# Altium PCB PCB1.PcbDoc
Units mm, origin at the board's own origin, x right, y up, seen from the top; angles counter-clockwise.
Board outline 55.12 x 55.63 mm, 2 copper layers (Top Layer, Bottom Layer); 19 components, 24 nets, 84 pads, 0 vias.
Unrouted connection lines stored in the file: 19.
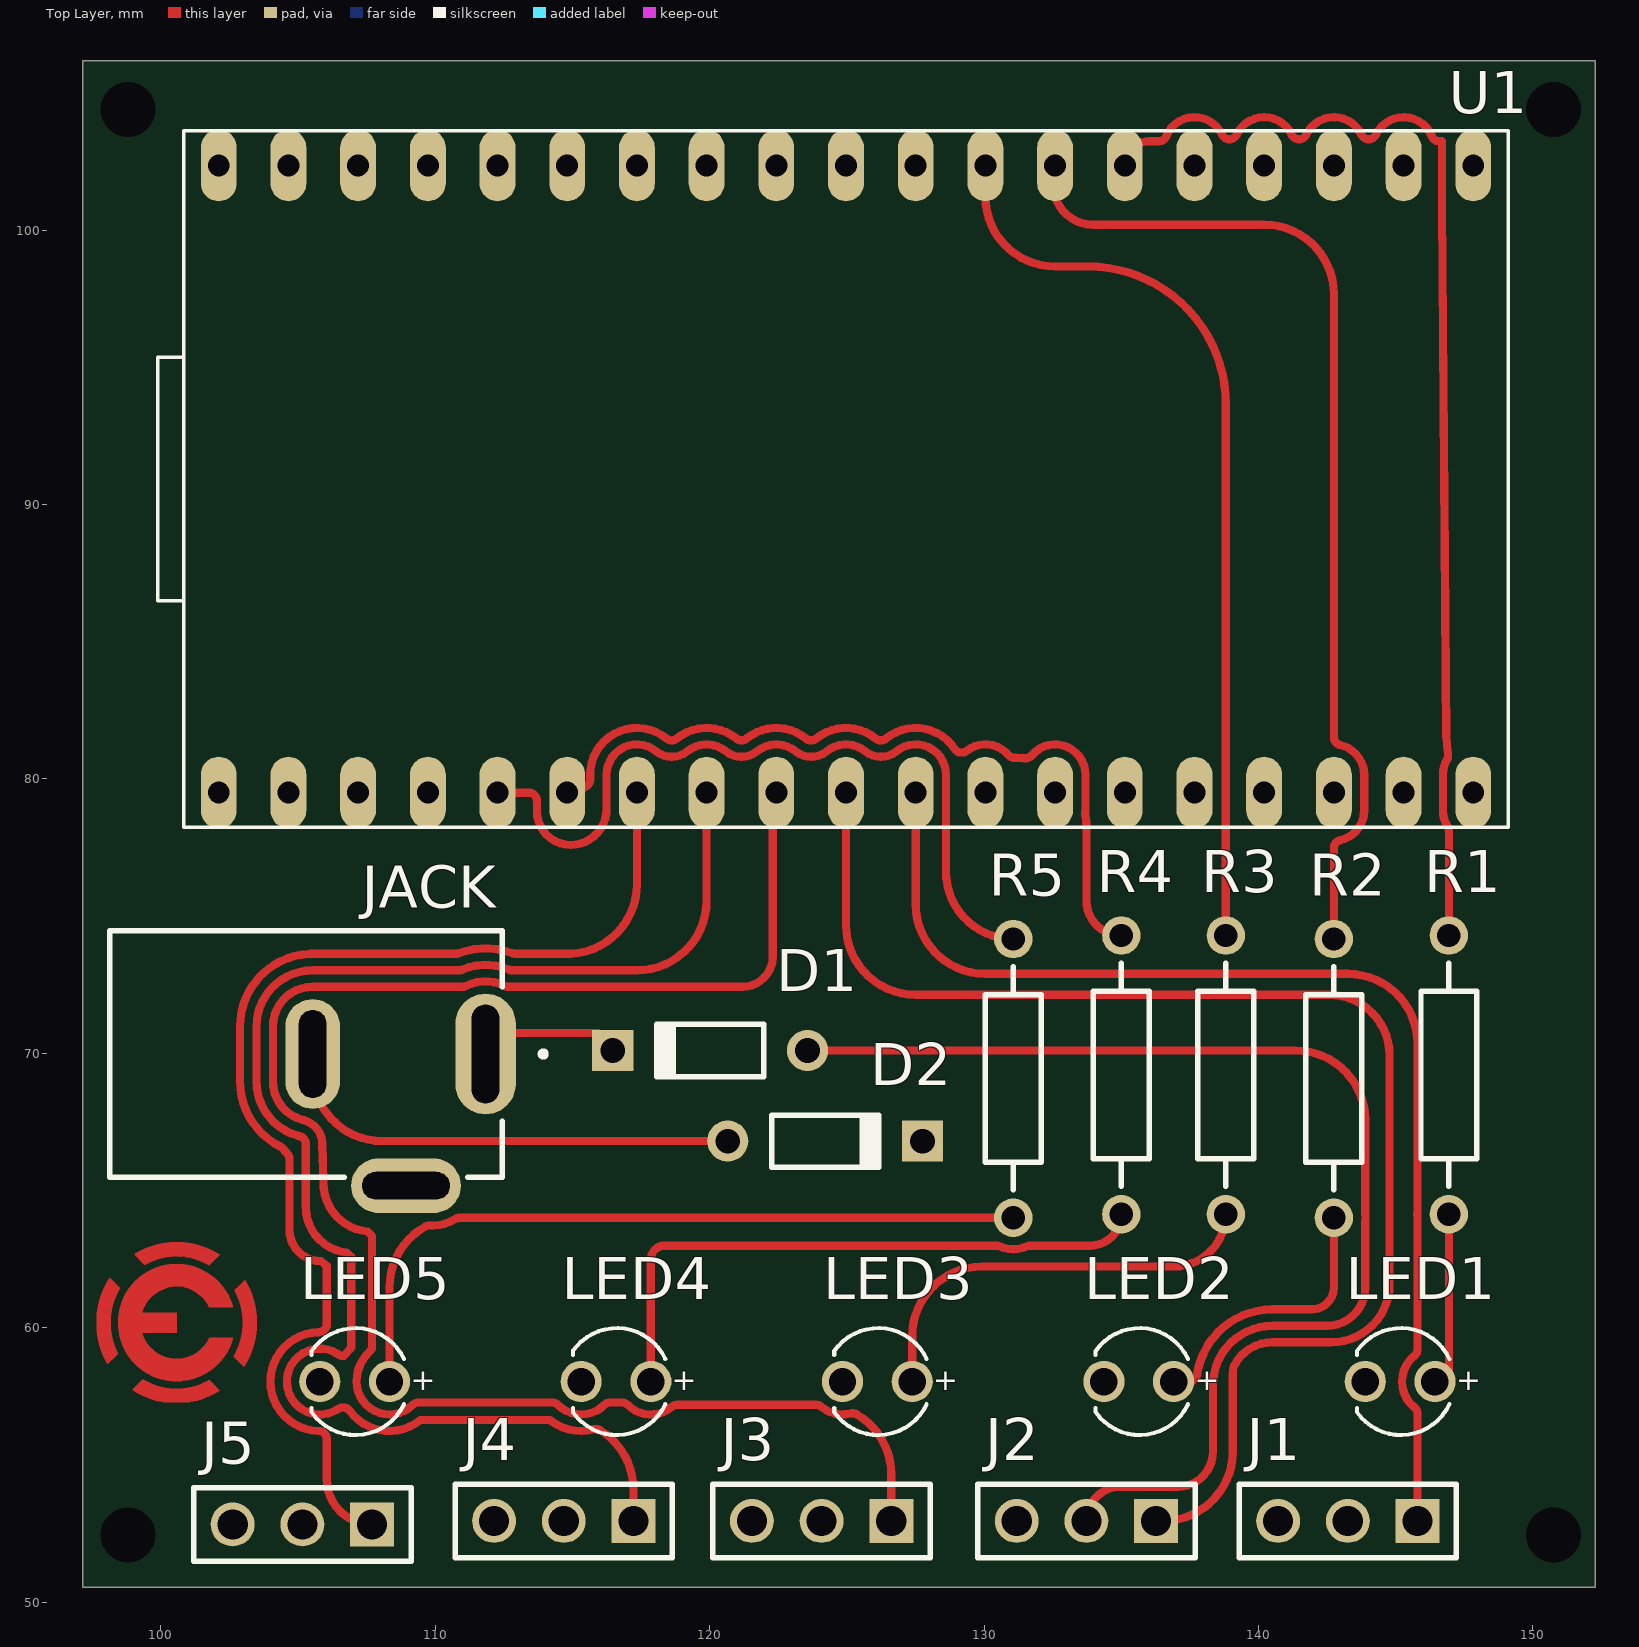
[diagram p0: Top Layer view]
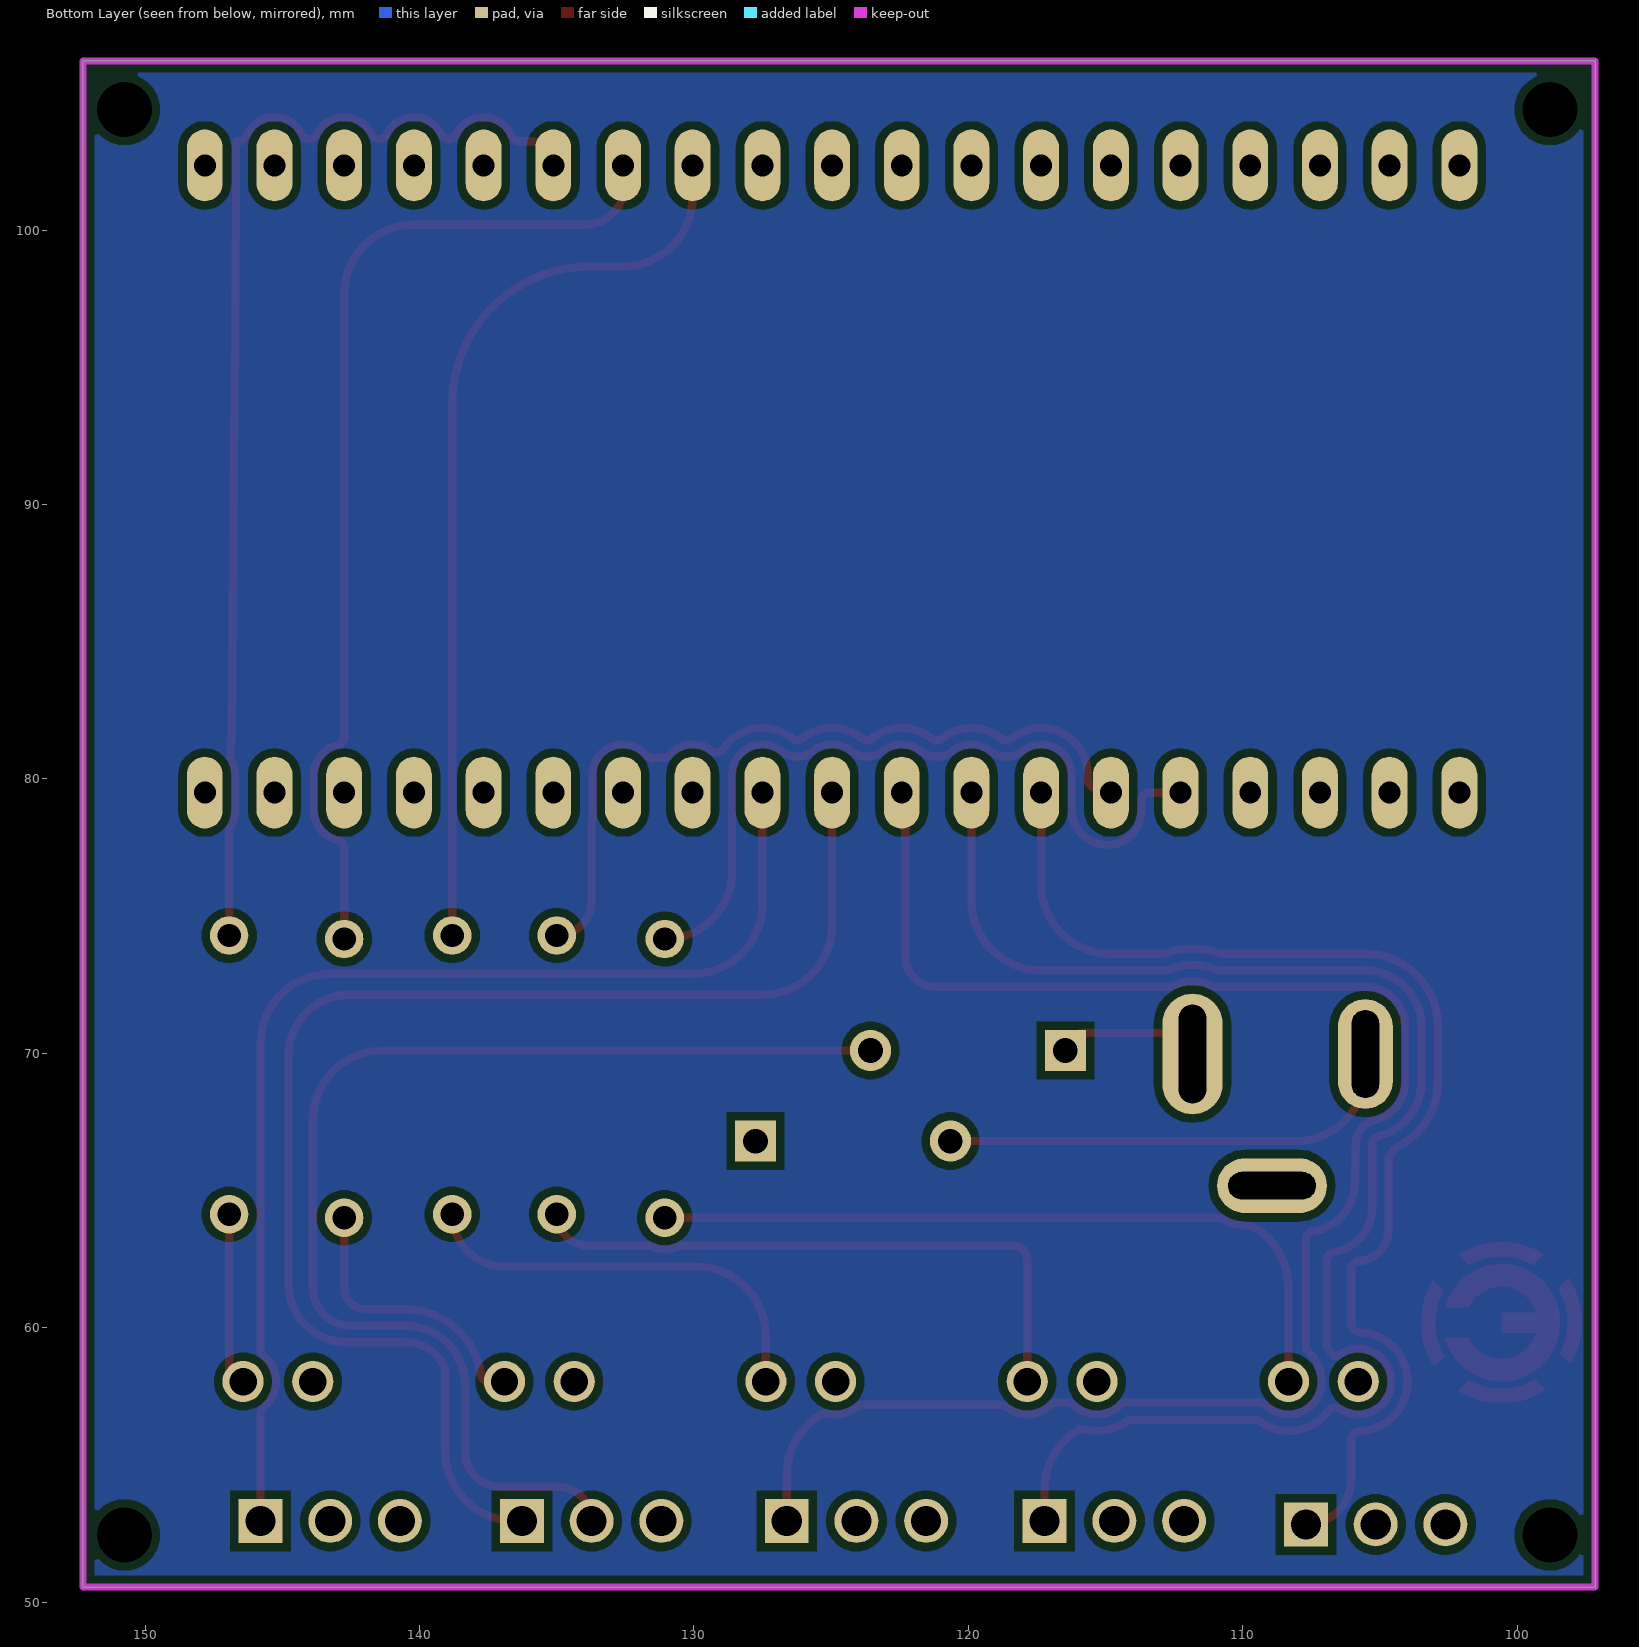
[diagram p1: Bottom Layer view, seen from below]
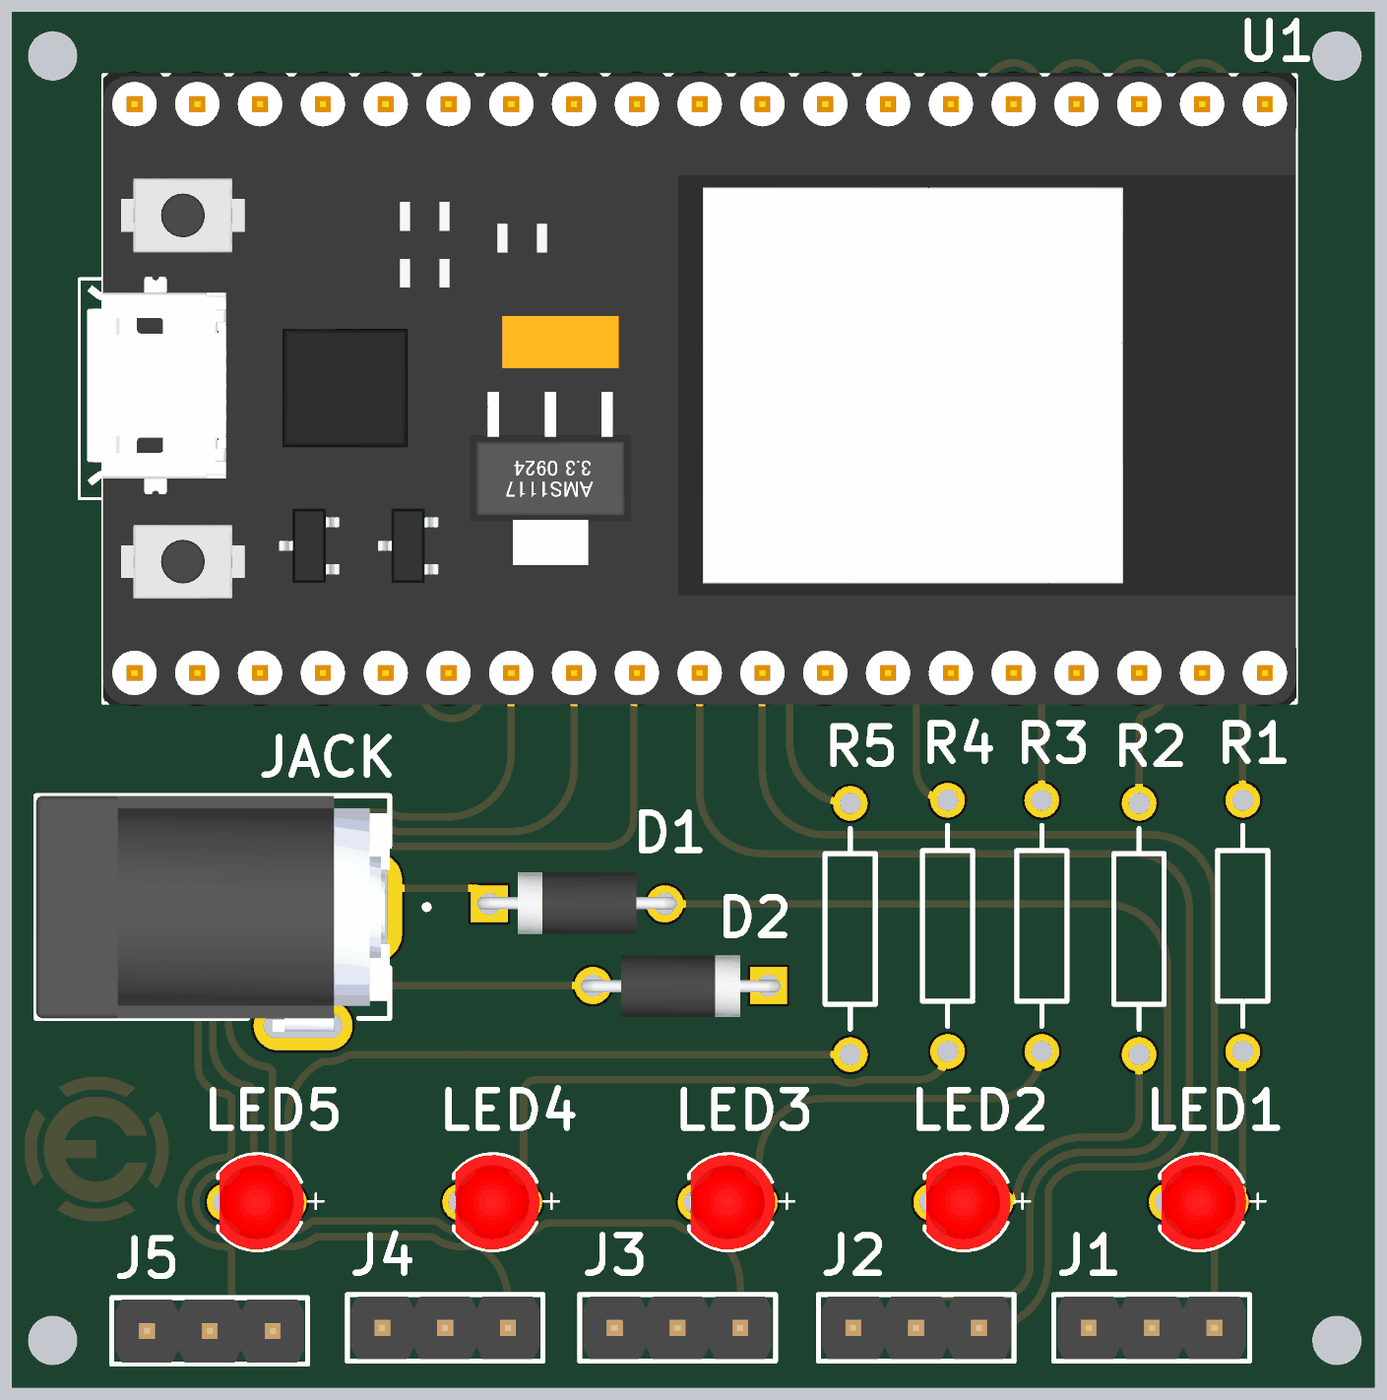
[diagram p2: 3D render of the assembled board from above, using the file's embedded part models]

## Layer stack, top to bottom
Top Solder: solder mask 0.0102, Solder Resist, Dk 3.5
Top Layer: signal copper 0.0356
Dielectric 1: dielectric 0.32, FR-4, Dk 4.8
Bottom Layer: signal copper 0.0356
Bottom Solder: solder mask 0.0102, Solder Resist, Dk 3.5

## Board outline
97.155,50.546 152.273,50.546 152.273,106.172 97.155,106.172

## Design rules (kind name [scope] priority, off if disabled: settings)
Clearance [All] p1: gap=0.3 ignorepadtopadclearanceinfootprint=FALSE
HoleSize [All] p1: absolutevalues=TRUE maxlimit=10 minlimit=0.4 maxpercent=80.000 minpercent=20.000
PolygonConnect [All] p1: connectstyle=Relief reliefconductorwidth=0.254 reliefentries=4 polygonreliefangle="90 Angle" airgapwidth=0.254
RoomDefinition "Copy of SCH Placa presentation" [InComponentClass('Copy of SCH Placa presentation')] p1: confinementstyle=ConfineIn formatcopy=TRUE lockcomponents=FALSE outline 97.028,50.419 152.4,50.419 152.4,106.299 97.028,106.299
RoutingVias [All] p1: holewidth=0.711 width=1.2 viastyle="Through Hole" minholewidth=0.711 minwidth=1.2 maxholewidth=0.711 maxwidth=1.27
SilkToSilkClearance [All] p1: silktosilkclearance=0.3
SolderMaskExpansion [All] p1: expansion=0.102 istentingtop=FALSE
Width [All] p1: maxlimit=10 minlimit=0.3 preferedwidth=0.3
28 further rules are at their usual default settings.

## Classes and differential pairs
component class "Copy of SCH Placa presentation": D1 D2 "DC jack1" J2 J3 J4 J5 JACK LED1 LED2 LED3 LED4 LED5 R1 R2 R3 R4 R5

## Components (designator, comment, footprint, x,y, rotation, side; value= is the part's Value field where it differs from the comment)
D1 "Diode 1N4148" DO-35 120.015,70.104 r180 top
D2 "Diode 1N4148" DO-35 124.206,66.802 r0 top
J1 "61300311121" 61300311121 143.256,52.959 r180 top
J2 "61300311121" 61300311121 133.731,52.959 r180 top
J3 "61300311121" 61300311121 124.079,52.959 r180 top
J4 "61300311121" 61300311121 114.681,52.959 r180 top
J5 "61300311121" 61300311121 105.156,52.832 r180 top
JACK "DCJ200-10-A-XX-K_REVA" GCT_DCJ200-10-A-XX-K_REVA 105.283,69.977 r270 top
LED1 "Blue, 3.2V, 40deg" "LED RED 3MM" 145.161,58.039 r180 top
LED2 "Blue, 3.2V, 40deg" "LED RED 3MM" 135.636,58.039 r180 top
LED3 "Blue, 3.2V, 40deg" "LED RED 3MM" 126.111,58.039 r180 top
LED4 "Blue, 3.2V, 40deg" "LED RED 3MM" 116.586,58.039 r180 top
LED5 "Blue, 3.2V, 40deg" "LED RED 3MM" 107.061,58.039 r180 top
R1 "Res" "RES AXIAL-0.4" 146.939,69.215 r270 top value=1K
R2 "Res" "RES AXIAL-0.4" 142.748,69.088 r270 top value=1K
R3 "Res" "RES AXIAL-0.4" 138.811,69.215 r270 top value=1K
R4 "Res" "RES AXIAL-0.4" 135.001,69.215 r270 top value=1K
R5 "Res" "RES AXIAL-0.4" 131.064,69.088 r270 top value=1K
U1 "NODE MCU 32S" BOARD 124.968,90.932 r270 top

## Footprints (in the part's own frame and the unit in brackets; to place one, negate y for a bottom-side part, rotate by r counter-clockwise, add the part's x,y. Pads: shape width x height; smd on the part's side, far side on the other; paste and mask are expansions set on the pad)
61300311121 [mm] "Pin Header, pitch 2.54 mm, THT, Vertical, single row, 3p"
  rect 1.6x1.6 hole 1.1: 1(-2.54,0)
  round 1.6 hole 1.1: 2(0,0) 3(2.54,0)
  silkscreen extent -3.96,-1.34 3.96,1.34, body extent -3.81,-1.27 3.81,1.27, height 8.57
BOARD [mm]
  oval 2.616x1.308 hole 0.8: 1(-11.43,22.86) 2(-11.43,20.32) 3(-11.43,17.78) 4(-11.43,15.24) 5(-11.43,12.7) 6(-11.43,10.16) 7(-11.43,7.62) 8(-11.43,5.08) 9(-11.43,2.54) 10(-11.43,0) 11(-11.43,-2.54) 12(-11.43,-5.08) 13(-11.43,-7.62) 14(-11.43,-10.16) 15(-11.43,-12.7) 16(-11.43,-15.24) 17(-11.43,-17.78) 18(-11.43,-20.32) 19(-11.43,-22.86) 20(11.43,22.86) 21(11.43,20.32) 22(11.43,17.78) 23(11.43,15.24) 24(11.43,12.7) 25(11.43,10.16) 26(11.43,7.62) 27(11.43,5.08) 28(11.43,2.54) 29(11.43,0) 30(11.43,-2.54) 31(11.43,-5.08) 32(11.43,-7.62) 33(11.43,-10.16) 34(11.43,-12.7) 35(11.43,-15.24) 36(11.43,-17.78) 37(11.43,-20.32) 38(11.43,-22.86)
  silkscreen extent -12.7,-25.08 12.7,24.13, body extent -12.78,-24.77 12.77,24.14, height 9.71
DO-35 [mm] "Diode, Axial; Body 3.8 x 1.9 mm (LxDia. max), Lead Dia. 0.53 mm (max)"
  round 1.5 hole 0.9: 1(-3.55,0)
  rect 1.5x1.5 hole 0.9: 2(3.55,0)
  silkscreen extent -1.95,-0.95 2.05,0.95, body extent -4.06,-1.27 4.06,1.22, height 3.23
GCT_DCJ200-10-A-XX-K_REVA [mm]
  oval 4.4x2.2 hole 1 slot 3.6 at 0 deg: 1(0,6.55)
  oval 4x2 hole 1 slot 3.2 at 0 deg: 2(0,0.25)
  oval 2x4 hole 1 slot 3.2 at 90 deg: 3(4.8,3.65)
  silkscreen extent -4.5,-7.15 4.5,8.75, body extent -4.5,-7.15 5.05,7.15, height 11
"LED RED 3MM" [mm] "THT Mono-color Round Color LED, 2-leads"
  round 1.5 hole 1: 1(1.27,0) 2(-1.27,0)
  silkscreen extent -1.8,-1.95 1.57,1.95, body extent -1.92,-1.92 1.52,1.92, height 5.38
"RES AXIAL-0.4" [mm] "Axial Device, Thru-Hole; 2 Leads; 0.4 in Pin Spacing"
  round 1.4 hole 0.85: 1(-5.08,0) 2(5.08,0)
  silkscreen extent -4.06,-1.02 4.06,1.02, body extent -5.47,-1.14 5.47,1.4, height 2.72

## Part data
D1 D2: "High Conductance Fast Diode", Code_JEDEC=DO-204-AH, ComponentLink1Description="Manufacturer Link", ComponentLink1URL=http://www.fairchildsemi.com/, ComponentLink2Description=Datasheet, ComponentLink2URL=http://www.fairchildsemi.com/ds/1N%2F1N4148.pdf, DatasheetVersion=1997, LatestRevisionDate=17-Jul-2002, LatestRevisionNote="Re-released for DXP Platform.", PackageDescription="Diode, Axial; Body 3.8 x 1.9 mm (LxDia. max), Lead Dia. 0.53 mm (max)", PackageReference=DO-35, Published=8-Jun-2000, Publisher="Altium Limited"
J1 J2 J3 J4 J5: "WR-PHD Pin Header, THT, pitch 2.54mm, Single Row, Vertical, 3pin", Contact Resistance=20mOhm, Operating Temperature="-40 to +105degC", Rated Current=3A, Withstanding Voltage=500VAC, Working Voltage=250VAC, ComponentLink1Description=Manufacturer, ComponentLink1URL=http://www.we-online.de, ComponentLink2Description=Datasheet, ComponentLink2URL=https://katalog.we-online.de/em/datasheet/6130xx11121.pdf, Gender=Male, Mounting Technology=THT, Orientation=Vertical, Packaging=Bag, Part Number=61300311121, Pin Number=3, Pitch=2.54mm, Published Date="June 2019", Publisher="Wurth Elektronik", Row Number=Single
JACK: "Power Barrel Connector Jack 2.05mm ID (0.081), 5.50mm OD (0.217) Through Hole, Right Angle", Package=None, Check_prices=https://www.snapeda.com/parts/DCJ200-10-A-K1-K/Global+Connector+Technology/view-part/?ref=eda, MF="Global Connector Technology", MP=DCJ200-10-A-K1-K, SnapEDA_Link=https://www.snapeda.com/parts/DCJ200-10-A-K1-K/Global+Connector+Technology/view-part/?ref=snap
LED1 LED2 LED3 LED4 LED5: library part LED, "LED WL-TMRC THT Mono-color Round", Emitting Color=Blue, Forward Voltage=3.2V, Operating Temperature="-40 to +85degC", Part Number=151051BS04000, Chip Technology=GaN, ComponentLink1Description=Manufacturer, ComponentLink1URL=http://www.we-online.de, ComponentLink2Description=Datasheet, ComponentLink2URL=https://katalog.we-online.de/led/datasheet/151051BS04000.pdf, Dominant Wavelength=470nm, Luminous Intensity=500mcd, Mounting Technology=THT, Packaging=Bulk, Peak Wavelength=465nm, Published Date="October 2019", Publisher="Wurth Elektronik", Size=5mm, Viewing Angle=40deg
R1 R2 R3 R4 R5: "Resistor", LatestRevisionDate=17-Jul-2002, LatestRevisionNote="Re-released for DXP Platform.", PackageDescription="Axial Device, Thru-Hole; 2 Leads; 0.4 in Pin Spacing", PackageReference=AXIAL-0.4, Published=8-Jun-2000, Publisher="Altium Limited"
U1: Package=None, Availability=Warning, Check_prices=https://www.snapeda.com/parts/ESP32-DEVKITC-32D/Espressif%20Systems/view-part/2777395/?ref=eda, MF="Espressif Systems", MP=ESP32-DEVKITC-32D, Price=None, Purchase-URL=https://pricing.snapeda.com/search/part/ESP32-DEVKITC-32D/?ref=eda, SnapEDA_Link=https://www.snapeda.com/parts/ESP32-DEVKITC-32D/Espressif%20Systems/view-part/2777395/?ref=snap

## Free pads (board coordinates)
  round 0 hole 2 unplated: 9(98.806,52.451) 9(98.806,104.394) 9(150.749,52.451) 9(150.749,104.394)

## Nets (pads, with @x,y where several pads share a name; then routed paths per layer and width w, separated by ;. In a path a pad name is that pad's centre, name@x,y a point inside that pad or via, vN(x,y) a via of type N, cw(c..) or ccw(c..) an arc to the next point about the centre after c; other vN are vias at no path point)
GND: D2.2 J1.3 J2.3 J3.3 J4.3 J5.3 LED1.1 LED2.1 LED3.1 LED4.1 LED5.1 U1.5 U1.14 U1.20 U1.26
NetD1_1: D1.1 J1.2 J2.2 J3.2 J4.2 J5.2 U1.2 | length 44
  Top Layer w0.3: D1.1 141.352,70.104 cw(c141.352,67.564) 143.892,67.564 143.892,64.122 ; J2.2 cw(c134.981,52.959) 134.981,54.209 137.071,54.209 ccw(c137.071,55.477) 138.339,55.477 138.339,57.901 cw(c140.51,57.901) 140.51,60.071 142.497,60.071 ccw(c142.497,61.467) 143.892,61.467 143.892,63.867 143.892,63.894 ccw(c142.748,64.008) 143.892,64.122 ; 143.891,64.148 ccw(c144.191,64.15) 143.892,64.123
NetD1_2: D1.2 JACK.1 | length 5.4
  Top Layer w0.3: JACK.1 cw(c112.595,69.977) 112.595,70.739 115.83,70.739 cw(c115.83,70.104) D1.2
NetD2_1: D2.1 JACK.2 | length 18.2
  Top Layer w0.3: JACK.2 105.533,69.342 ccw(c108.073,69.342) 108.073,66.802 D2.1
  Bottom Layer w0.3: JACK.2@105.533,68.977 JACK.2
NetJ1_1: J1.1 U1.28 | length 43
  Top Layer w0.3: U1.28 127.508,75.438 ccw(c130.048,75.438) 130.048,72.898 143.256,72.898 cw(c143.256,70.358) 145.796,70.358 145.796,64.273 cw(c145.496,64.275) 145.795,64.247 ccw(c146.939,64.135) 145.795,64.023 cw(c145.496,63.995) 145.796,63.997 145.796,59.211 cw(c145.496,59.212) 145.684,58.978 ccw(c146.431,58.039) 145.683,57.1 cw(c145.496,56.866) 145.796,56.867 J1.1
NetJ2_1: J2.1 U1.29 | length 50.3
  Top Layer w0.3: U1.29 124.968,74.676 ccw(c127.508,74.676) 127.508,72.136 142.569,72.136 cw(c142.569,69.925) 144.78,69.925 144.78,61.595 cw(c142.656,61.595) 142.656,59.471 140.51,59.471 ccw(c140.51,57.901) 139.12,58.633 ccw(c139.386,58.494) 139.093,58.558 ccw(c140.335,58.293) 139.065,58.293 139.065,55.499 cw(c136.525,55.499) 136.525,52.959 J2.1
NetJ3_1: J3.1 U1.30 | length 64.6
  Top Layer w0.3: 109.388,57.277 ccw(c109.39,56.977) 109.179,57.19 cw(c108.331,58.039) 107.131,58.039 cw(c108.628,58.039) 107.602,59.129 cw(c108.628,58.039) 107.605,59.132 107.696,59.223 107.696,63.346 107.608,63.434 107.535,63.507 cw(c107.696,65.275) 105.921,65.28 105.921,65.283 105.921,65.287 105.883,66.715 ccw(c104.983,66.691) 105.221,67.559 105.15,67.578 cw(c105.533,68.977) 104.083,68.977 104.083,70.977 cw(c105.533,70.977) 105.533,72.427 110.021,72.426 110.995,72.426 ccw(c110.994,72.726) 111.129,72.458 cw(c111.833,71.077) 112.537,72.458 ccw(c112.673,72.726) 112.671,72.426 121.194,72.426 ccw(c121.194,73.533) 122.301,73.533 122.301,79.375 cw(c122.428,79.375) U1.30 ; 109.389,57.277 114.258,57.277 cw(c114.257,56.977) 114.468,57.19 ccw(c115.316,58.039) 116.164,57.19 cw(c116.375,56.977) 116.374,57.277 116.798,57.277 cw(c116.797,56.977) 117.008,57.19 ccw(c117.856,58.039) 118.628,57.121 cw(c118.82,56.89) 118.819,57.19 123.878,57.19 cw(c123.877,56.89) 124.069,57.12 ccw(c124.841,58.039) 125.136,56.876 cw(c125.208,56.585) 125.359,56.844 cw(c124.079,54.65) 126.619,54.65 J3.1
NetJ4_1: J4.1 U1.31 | length 56
  Top Layer w0.3: 105.283,66.692 105.283,64.389 ccw(c106.934,64.389) 106.774,62.746 106.846,62.673 106.934,62.585 106.934,59.369 106.934,59.276 106.674,58.98 106.634,58.98 106.59,58.98 cw(c106.632,59.279) 106.5,59.007 ccw(c105.791,58.039) 106.427,59.057 ccw(c105.791,58.039) 106.414,57.013 106.481,57.054 cw(c106.637,56.798) 106.878,56.976 ccw(c108.331,58.039) 109.432,56.615 cw(c109.615,56.377) 109.474,56.642 114.08,56.642 cw(c114.079,56.342) 114.255,56.585 ccw(c115.316,58.039) 115.779,56.299 cw(c115.855,56.009) 116.012,56.265 cw(c114.681,54.102) 117.221,54.102 J4.1 ; 105.283,66.693 ccw(c104.983,66.691) 105.062,66.98 104.99,67 cw(c105.533,68.977) 103.483,68.977 103.483,70.977 cw(c105.533,70.977) 105.533,73.027 110.865,73.027 ccw(c110.863,73.327) 110.981,73.051 cw(c111.833,71.077) 112.685,73.051 ccw(c112.803,73.327) 112.801,73.027 117.348,73.027 ccw(c117.348,75.567) 119.888,75.567 U1.31
NetJ5_1: J5.1 U1.32 | length 43.8
  Top Layer w0.3: 104.521,66.421 ccw(c104.236,66.327) 104.368,66.597 cw(c105.533,68.977) 102.883,68.977 102.883,70.977 cw(c105.533,70.977) 105.405,73.624 ; 104.522,66.421 cw(c104.383,66.155) 104.683,66.155 104.683,63.575 ccw(c105.831,63.575) 105.831,62.427 106.045,62.26 106.045,60.137 cw(c105.745,60.138) 105.753,59.839 ccw(c105.791,58.039) 105.752,56.239 cw(c105.745,55.94) 106.045,55.941 106.045,54.483 ccw(c107.696,54.483) J5.1 ; 105.543,73.627 cw(c105.534,73.927) 105.535,73.627 105.533,73.627 ; U1.32 117.348,76.164 cw(c114.808,76.164) 114.94,73.627 cw(c114.926,73.927) 114.927,73.627 112.918,73.627 cw(c112.919,73.927) 112.814,73.646 ccw(c111.833,71.077) 110.853,73.646 cw(c110.747,73.927) 110.748,73.627 105.533,73.627 ; 105.405,73.624 cw(c105.533,70.977) 105.407,73.624 cw(c105.533,70.977) 105.533,73.627 ; 105.405,73.624 cw(c105.533,70.977) 105.533,73.627
NetLED1_2: LED1.2 R1.2 | length 6.4
  Top Layer w0.3: LED1.2 ccw(c146.431,58.547) 146.939,58.547 R1.2
NetLED2_2: LED2.2 R2.2 | length 10.2
  Top Layer w0.3: LED2.2 137.472,58.039 ccw(c137.47,58.339) 137.767,58.295 cw(c140.51,57.901) 140.508,60.671 141.951,60.671 ccw(c141.951,61.468) 142.748,61.468 R2.2
NetLED3_2: LED3.2 R3.2 | length 15.6
  Top Layer w0.3: LED3.2 127.381,59.69 cw(c129.921,59.69) 129.921,62.23 136.906,62.23 ccw(c136.906,64.135) R3.2
NetLED4_2: LED4.2 R4.2 | length 22.6
  Top Layer w0.3: LED4.2 117.856,62.484 cw(c118.364,62.484) 118.364,62.992 130.456,62.992 cw(c130.455,62.692) 130.58,62.965 ccw(c131.064,64.008) 131.548,62.965 cw(c131.673,62.692) 131.672,62.992 133.858,62.992 ccw(c133.858,64.135) R4.2
NetLED5_2: LED5.2 R5.2 | length 27.6
  Top Layer w0.3: LED5.2 108.331,61.468 cw(c110.871,61.468) 109.64,63.69 cw(c109.785,63.427) 109.784,63.727 109.933,63.727 ccw(c109.933,65.177) 110.722,63.961 cw(c110.885,63.708) 110.871,64.008 R5.2
NetR1_1: R1.1 U1.6 | length 43.7
  Top Layer w0.3: U1.6 cw(c136.009,102.362) 136.009,103.243 136.368,103.243 ccw(c136.367,103.543) 136.644,103.43 cw(c137.668,103.016) 138.667,103.486 ccw(c138.938,103.615) 139.209,103.486 cw(c140.208,103.016) 141.207,103.486 ccw(c141.478,103.615) 141.749,103.486 cw(c142.748,103.016) 143.747,103.486 ccw(c144.018,103.615) 144.289,103.486 cw(c145.288,103.016) 146.312,103.429 ccw(c146.589,103.543) 146.588,103.243 146.693,103.243 146.693,100.844 146.847,81.55 ccw(c147.747,81.558) 146.852,81.467 146.91,80.887 cw(c146.612,80.857) 146.872,80.707 ccw(c147.828,80.156) 146.724,80.156 146.724,78.848 ccw(c147.828,78.848) 146.894,78.26 cw(c146.639,78.101) 146.939,78.102 R1.1
NetR2_1: R2.1 U1.7 | length 37.8
  Top Layer w0.3: U1.7 132.552,101.866 132.552,101.854 ccw(c133.963,101.631) 133.959,100.202 140.208,100.202 cw(c140.208,97.662) 142.748,97.662 142.748,95.517 142.748,95.516 142.748,81.526 ccw(c143.048,81.528) 142.983,81.235 cw(c142.748,80.156) 143.852,80.156 143.852,78.848 cw(c142.748,78.848) 142.984,77.769 ccw(c143.048,77.476) 142.748,77.478 R2.1
NetR3_1: R3.1 U1.8 | length 33.6
  Top Layer w0.3: U1.8 130.048,101.219 ccw(c132.588,101.219) 132.588,98.679 133.787,98.679 cw(c133.787,93.655) 138.811,93.655 R3.1
NetR4_1: R4.1 U1.33 | length 29
  Top Layer w0.3: U1.33 ccw(c114.808,80.702) 115.524,79.739 ccw(c115.344,79.979) 115.644,79.978 115.644,80.156 cw(c117.348,80.156) 116.008,81.208 cw(c117.348,80.156) 118.428,81.474 ; 118.429,81.473 ccw(c118.618,81.706) 118.807,81.473 cw(c119.888,80.156) 120.969,81.473 ccw(c121.158,81.706) 121.347,81.473 cw(c122.428,80.156) 123.509,81.473 ccw(c123.698,81.706) 123.887,81.473 cw(c124.968,80.156) 126.049,81.473 ccw(c126.238,81.706) 126.427,81.473 cw(c127.508,80.156) 128.931,81.093 ccw(c129.181,81.26) 129.365,81.023 cw(c130.048,80.156) 130.886,80.875 ccw(c131.112,81.072) 131.111,80.772 131.191,80.772 cw(c131.191,78.232) 131.477,80.756 ccw(c131.509,81.054) 131.739,80.861 cw(c132.588,80.156) 133.692,80.156 133.692,78.848 cw(c132.588,78.848) 133.688,78.754 ccw(c133.987,78.73) 133.691,78.679 cw(c131.191,78.232) 133.731,78.232 133.731,75.565 ccw(c135.001,75.565) R4.1
NetR5_1: R5.1 U1.34 | length 29.1
  Top Layer w0.3: U1.34 113.404,79.502 cw(c113.404,79.202) 113.704,79.202 113.704,78.828 ccw(c114.935,78.828) 114.935,77.597 ccw(c114.935,78.906) 116.244,78.906 116.244,80.156 cw(c117.348,80.156) 118.05,81.008 ccw(c118.618,81.706) 119.187,81.008 cw(c119.888,80.156) 120.59,81.008 ccw(c121.158,81.706) 121.727,81.008 cw(c122.428,80.156) 123.13,81.008 ccw(c123.698,81.706) 124.267,81.008 cw(c124.968,80.156) 125.67,81.008 ccw(c126.238,81.706) 126.807,81.008 cw(c127.508,80.156) 128.612,80.156 128.612,76.62 ccw(c131.064,76.62) R5.1
NetU1_9: U1.9
NetU1_10: U1.10
NetU1_11: U1.11
NetU1_12: U1.12
NetU1_13: U1.13
pads on no net: JACK.3 U1.1 U1.3 U1.4 U1.15 U1.16 U1.17 U1.18 U1.19 U1.21 U1.22 U1.23 U1.24 U1.25 U1.27 U1.35 U1.36 U1.37 U1.38

## Polygon pours and split planes (outlines as drawn)
no net on Bottom Layer "NONET_L02_P000" (solid, pour order 0): 97.155,106.172 152.273,106.172 152.273,50.546 97.155,50.546

## Keep-outs
Bottom Layer:
  the board outline again, w0.254

## Other copper
Top Layer:
  region: 861 vertices and 0 holes, not listed, extent 99.041,62.284 102.14,63.114
  region: 906 vertices and 0 holes, not listed, extent 102.652,58.587 103.5,61.727
  region: 912 vertices and 0 holes, not listed, extent 98.964,57.277 102.136,58.117
  region: 851 vertices and 0 holes, not listed, extent 97.663,58.687 98.507,61.814
  region: 2804 vertices and 0 holes, not listed, extent 98.439,58.053 102.624,62.311

## Text inside footprints (layer, text, board x,y; h text height)
LED1: Top Overlay "+" at 148.111,58.389 h0.8 r180
LED2: Top Overlay "+" at 138.586,58.389 h0.8 r180
LED3: Top Overlay "+" at 129.061,58.389 h0.8 r180
LED4: Top Overlay "+" at 119.536,58.389 h0.8 r180
LED5: Top Overlay "+" at 110.011,58.389 h0.8 r180